# EAGLE board mp28164-buck-boost-flashlight-driver-tester-mk-1.0.6.opamp.only (EAGLE 9.2.2)
VERSION: v1.0

Size 20 x 20 mm. Coordinates in mm from the lower left corner, seen from the top.
Outline: 0,20 20,20 20,0 0,0 0,20
Copper layers (1*16): Top 0.035559375mm / dielectric 1.6mm / Bottom 0.035559375mm
Design rules "oshpark-2layer": minimum track width 6mil, minimum drill 10mil, track to track 6mil, track to pad 6mil, pad to pad 6mil, via to via 6mil, smd to smd 0mil, copper to edge 15mil, drill to drill 6mil, minimum pad ring 5mil, minimum via ring 5mil, stop-mask expansion 2.5mil, vias tented up to drill 20mil, thermal gap 10mil

## Footprints (pad centres in the part's own frame; a part is rotated, then mirrored left to right if it is on the bottom)
C0402 = smd 0.7 x 0.9: 1 -0.65,0; 2 0.65,0
LED3MM = drill 0.813 pad 1.676 octagon: A -1.27,0; K 1.27,0
R0805-TIGHTER = smd 1 x 1.4: 1 -0.8,0; 2 0.8,0
R0402 = smd 0.7 x 0.9: 1 -0.65,0; 2 0.65,0

## Placement (x,y rotation side)
C8  .000000001  [C0402]  -0.6,-7.2 0 top  (outside the outline)
C14  0.000001  [C0402]  5.8,14.35 90 top
LED1  LED3MM  [LED3MM]  5.2,7.7 0 top
R1  .01  [R0805-TIGHTER]  15,2.5 90 top
R9  10000  [R0402]  9,16.3 180 top
R10  10000  [R0402]  15,5 0 top
R11  15K  [R0402]  2.9,16.25 90 top
R12  47000  [R0402]  15.1,13.75 90 top
R13  75K  [R0402]  15.7,9.35 90 top
R14  360000  [R0402]  11.6,13.55 90 top

## Library data of the parts
C8 C14 = a_parts; SPICEPREFIX: C
LED1 = a_parts; SPICEMODEL: DMOD; SPICEPREFIX: D
R1 R9-R14 = a_parts; SPICEPREFIX: R

## Nets
FB: R11.2 R12.1 R13.1
GND: C14.2 R10.2 R11.1
LED-: LED1.K R1.2
LOWPASS: C14.1 R9.1 R14.2
N$1: R1.1
OPAMP-: C8.1 R10.1 R14.1
OPAMP_OUT: C8.2 R12.2
PWM: R9.2
VCC: LED1.A R13.2

## Tracks (layer width: path | path; a pad name or v marks a point on that pad's centre or on a via)
FB  (2 unrouted)
GND  (2 unrouted)
LED-  (1 unrouted)
LOWPASS  (2 unrouted)
OPAMP-  (2 unrouted)
OPAMP_OUT  (1 unrouted)
VCC  (1 unrouted)